# Altium PCB N20网关A.PcbDoc (part 1 of 2)
Units mil, origin at the board's own origin, x right, y up, seen from the top; angles counter-clockwise.
Board outline 6309.92 x 4341.03 mil, 2 copper layers (Top Layer, Bottom Layer); 157 components, 170 nets, 607 pads, 1300 vias.
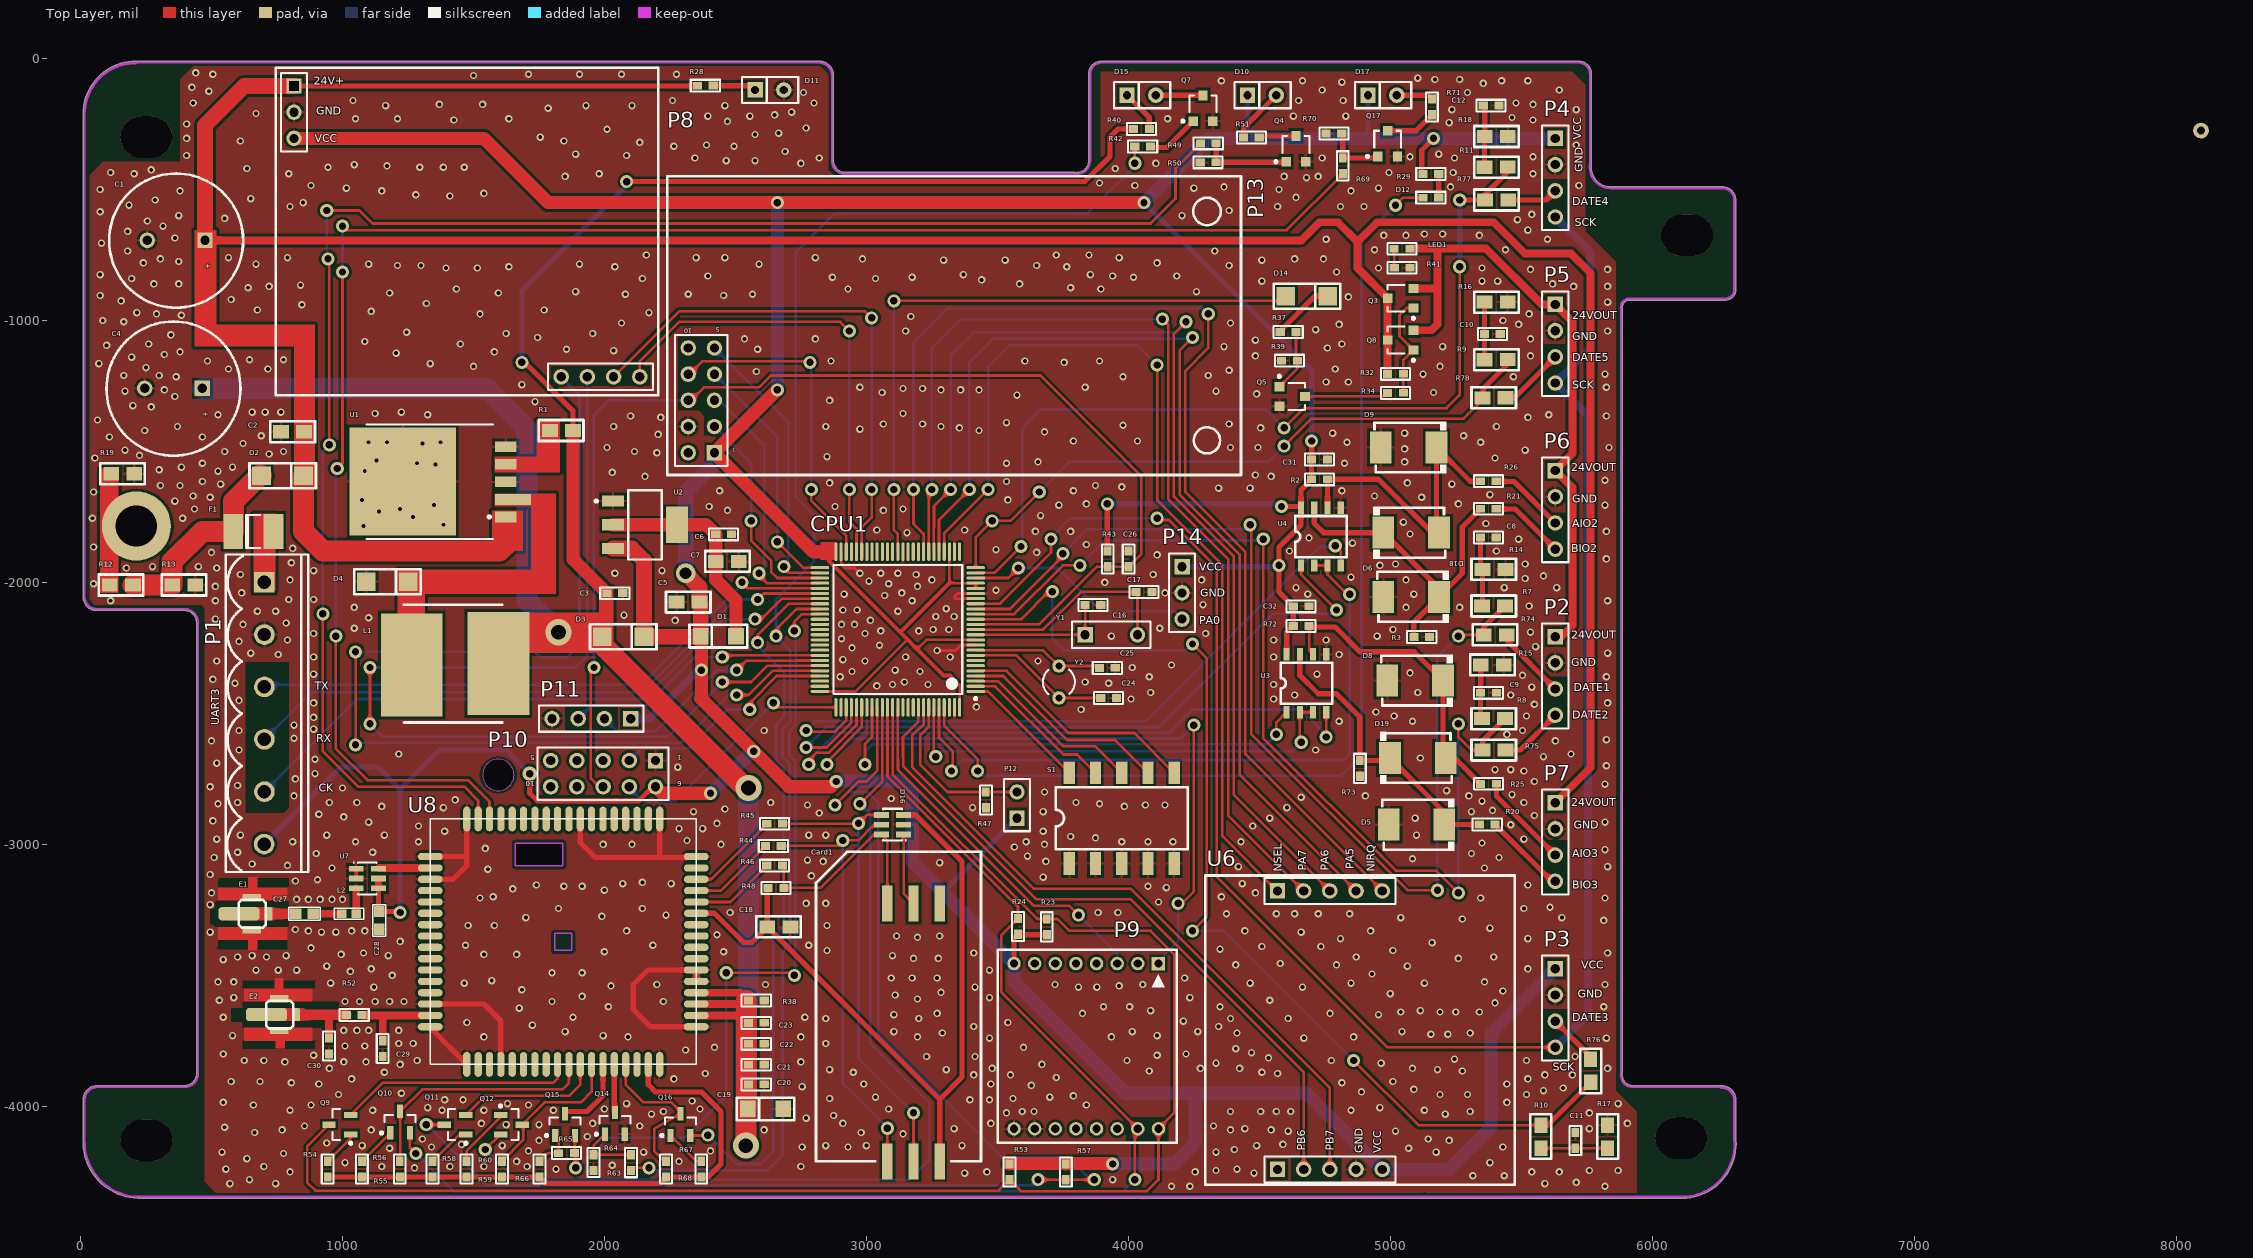
[diagram p0: Top Layer view]
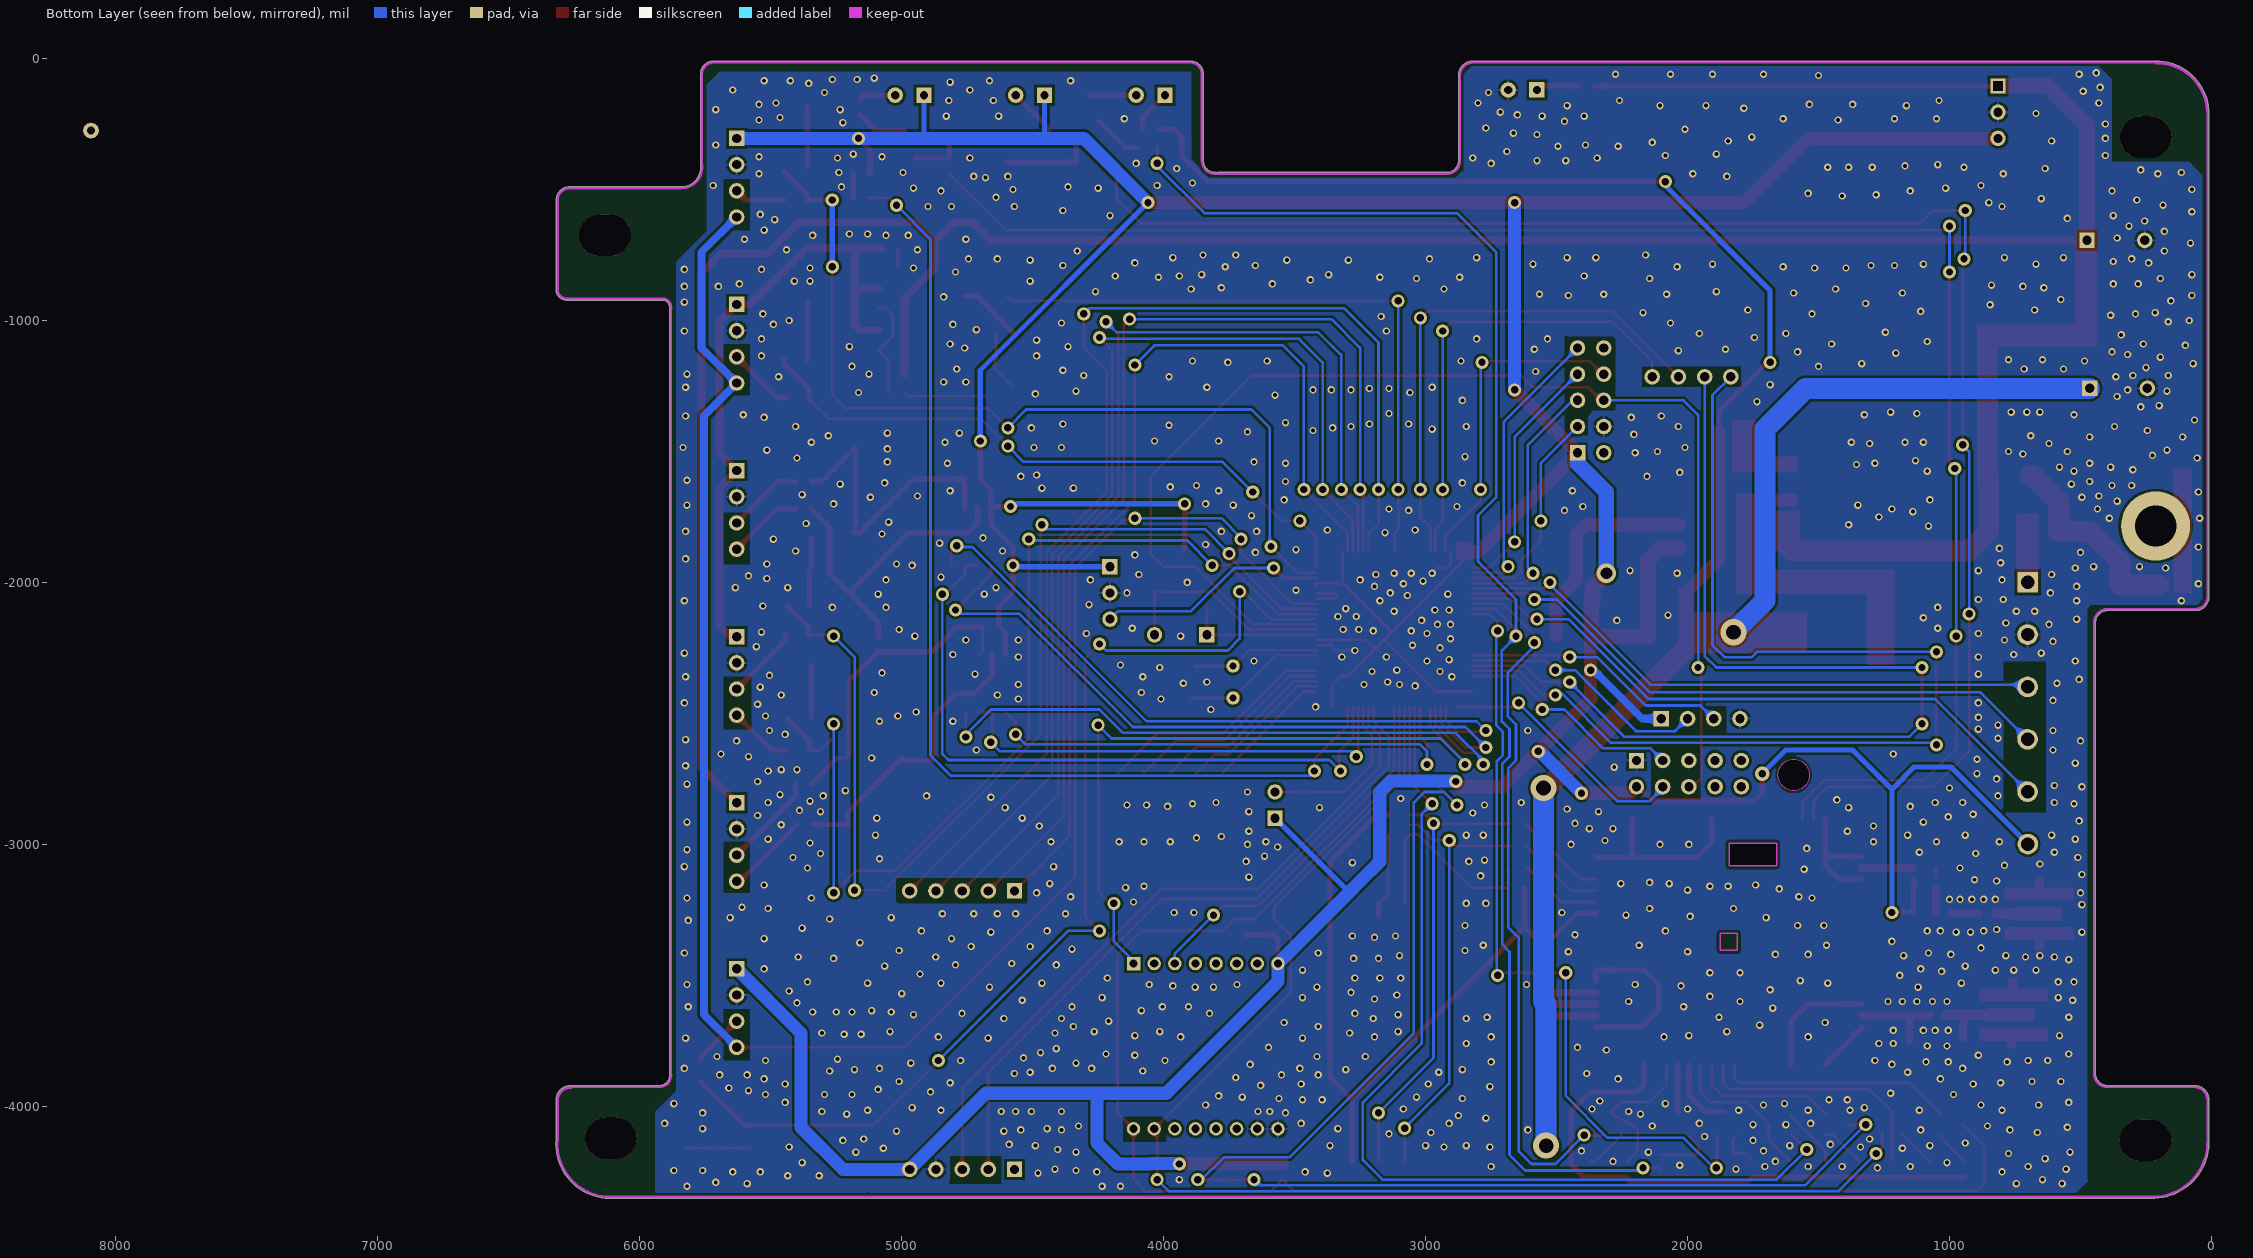
[diagram p1: Bottom Layer view, seen from below]

## Layer stack, top to bottom
Top Solder: solder mask 0.4, Solder Resist, Dk 3.5
Top Layer: signal copper 1.4
Dielectric 1: dielectric 12.6, FR-4, Dk 4.8
Bottom Layer: signal copper 1.4
Bottom Solder: solder mask 0.4, Solder Resist, Dk 3.5

## Board outline
9.98,-4128.92 ccw(c225,-4136) 217.83,-4351.01 ccw(c218,-4346) 219.69,-4350.72 3440.2,-4350.72 ccw(c3440.2,-4345.71) 3440.7,-4350.7 ccw(c3441.2,-4345.71) 3441.2,-4350.72 6128.31,-4350.72 ccw(c6130,-4346) 6130.47,-4350.99 ccw(c6111,-4143) 6319.9,-4143 ccw(c6111,-4143) 6319.01,-4123.77 6319.01,-3976 ccw(c6264,-3976) 6264,-3920.98 5925,-3920.98 cw(c5925,-3882) 5886.02,-3882.18 ccw(c5881.14,-3881) 5886.16,-3881 5886.16,-949 ccw(c5881.14,-949) 5885.98,-947.69 cw(c5913,-949) 5911.16,-922.02 6281.97,-922.02 ccw(c6282,-917) 6282.43,-922 ccw(c6279,-882) 6319.08,-884.19 ccw(c6314.21,-883) 6319.23,-883 ccw(c6314.21,-883) 6319.23,-883 6319.01,-539 ccw(c6314,-539) 6318.92,-538.05 ccw(c6267.5,-541.5) 6265.84,-489.99 ccw(c6266,-495) 6264.82,-490.12 5843.37,-490.12 ccw(c5841.19,-494.64) 5841.19,-489.63 cw(c5841.09,-415.7) 5767.25,-419.12 ccw(c5763.03,-416.4) 5768.05,-416.4 5768.05,-60 ccw(c5763.03,-60) 5768.05,-59.93 ccw(c5718.03,-60) 5718.03,-9.98 3898.58,-9.98 ccw(c3898.58,-60) 3848.57,-59.91 ccw(c3853.58,-60) 3848.57,-60 3848.57,-385 ccw(c3853.58,-385) 3849.23,-387.5 ccw(c3853.58,-390) 3848.57,-390 cw(c3803.58,-390) 3803.58,-434.98 ccw(c3803.58,-440) 3799.06,-437.84 ccw(c3794.53,-440) 3794.53,-434.98 2919.33,-434.98 cw(c2919.33,-390) 2874.35,-390 ccw(c2869.33,-390) 2874.35,-389.92 2874.35,-65 ccw(c2819.33,-65) 2819.33,-9.98 211.87,-9.98 ccw(c211.2,-211.2) 10.42,-197.96 ccw(c15,-200) 9.98,-200 9.98,-2058.11 ccw(c15,-2058.11) 10.07,-2059.02 ccw(c60.89,-2056.11) 60.89,-2107.01 397.88,-2107.01 cw(c395.5,-2154.5) 442.99,-2152.24 ccw(c448,-2152) 443.05,-2152.84 443.05,-3872.16 ccw(c448,-3873) 442.99,-3873.2 cw(c397,-3875) 443.02,-3875 cw(c397,-3875) 398.9,-3920.98 65,-3920.98 ccw(c65,-3976) 9.98,-3976
cut-out: 1660,-3081.73 1660,-2995.12 1840.91,-2995.12 1840.91,-3081.73
cut-out: 1535,-2735 ccw(c1595,-2735) 1595,-2795 ccw(c1595,-2735) 1655,-2735 ccw(c1595,-2735) 1595,-2675 ccw(c1595,-2735)

## Design rules (kind name [scope] priority, off if disabled: settings)
Clearance [All] p1: gap=10
HoleSize [All] p1: absolutevalues=TRUE maxlimit=999 minlimit=15 maxpercent=80.000 minpercent=20.000
HoleToHoleClearance [All] p1: gap=8 allowstackedmicrovias=TRUE
MinimumSolderMaskSliver [All] p1: minsoldermaskwidth=0
PolygonConnect [All] p1: connectstyle=Relief reliefconductorwidth=10 reliefentries=4 polygonreliefangle="90 Angle" airgapwidth=10
RoutingVias [InNet('GND')] p1: holewidth=15 width=28 viastyle="Through Hole" minholewidth=0 minwidth=0 maxholewidth=999 maxwidth=999
SilkToSilkClearance [All] p1: silktosilkclearance=0
SilkToSolderMaskClearance [IsPad] p1: minsilkscreentomaskgap=0 clearancetoexposedcopper=TRUE
SolderMaskExpansion [All] p1: expansion=4
Width [All] p1: maxlimit=100 minlimit=10 preferedwidth=10
25 further rules are at their usual default settings.

## Components (designator, comment, footprint, x,y, rotation, side; value= is the part's Value field where it differs from the comment)
C1 "C_470uF/63V" C470UF50V-H 365,-695 r90 top
C2 "C_0.1uF" 0805 765,-1425 r90 top
C3 "C_0.1uF" 0603 2030,-2040 r0 top
C4 "2200uF/25V" C470UF50V-H 355,-1260 r90 top
C5 "100nF" 0805 2275,-2075 r90 top
C6 "100nF" 0603 2445,-1815 r0 top
C7 "4.7uF" 0805 2425,-1920 r90 top
C8 "C_0.1uF" 0603 5384.28,-1830 r180 top
C9 "C_0.1uF" 0603 5365,-2420 r0 top
C10 "C_0.1uF" 0603 5380,-1050 r0 top
C11 "C_0.1uF" 0603 5705,-4140 r90 top
C12 "C_0.1uF" 0603 5375.23,-178.66 r0 top
C16 "C_10pF" 0603 3855,-2085 r0 top
C17 "C_10pF" 0603 4050,-2035 r0 top
C18 "C_0.1uF" 0805 2710,-3315 r270 top
C19 "220uF" 1206 2615,-4010 r0 top
C20 "C_0.1uF" 0603 2570,-3915 r0 top
C21 "C_0.1uF" 0603 2570,-3840 r0 top
C22 "C_0.1uF" 0603 2570,-3760 r0 top
C23 "C_0.1uF" 0603 2570,-3680 r0 top
C24 "C_10pF" 0603 3915,-2440 r0 top
C25 "C_10pF" 0603 3910,-2325 r0 top
C26 "C_100nF" 0603 4000,-1920 r90 top
C27 "470pF" 1608[0603] 855,-3265 r0 top
C28 "0.1uF" 1608[0603] 1140,-3290 r90 top
C29 "缺省" 0603 1155,-3770 r270 top
C30 "缺省" 0603 950,-3760 r270 top
C31 "0.1uF" 0603 4720,-1530 r0 top
C32 "0.1uF" 0603 4650,-2090 r0 top
Card1 "Card" SIM 3280,-4210 r90 top
CPU1 "STM32F103VET6" LQFP100_N 3120,-2180 r180 top
D1 "1N4148" 1206 2435,-2205 r0 top
D2 "MURA240" 1N4007-M7 855,-1590 r180 top
D3 "SS36" 1N4007-M7 2155,-2205 r180 top
D4 "SS36" 1N4007-M7 1255,-1995 r180 top
D5 "SMBJ6.8CA" DO-214AB 5100,-2925 r180 top
D6 "SMBJ6.8CA" DO-214AB 5080,-2055 r180 top
D8 "SMBJ6.8CA" DO-214AB 5095,-2375 r180 top
D9 "SMBJ6.8CA" DO-214AB 5070,-1485 r180 top
D10 "LED BLUE" LED-3mm 4455,-140 r0 top
D11 "LED RED" LED-3mm 2575,-120 r0 top
D12 "Green" 0603 5145,-530 r0 top
D14 "1N4007" 1N4007-M7 4765,-905 r180 top
D15 "LED GREEN" LED-3mm 3995,-140 r0 top
D16 "SRV05-4" SOT23-6 3100,-2925 r90 top
D17 "LED BLUE" LED-3mm 4915,-140 r0 top
D18 "SMBJ6.8CA" DO-214AB 5080,-1810 r0 top
D19 "SMBJ6.8CA" DO-214AB 5105,-2670 r0 top
E1 "Antenna" IPX 655,-3265 r90 top
E2 "Antenna" IPX 760,-3650 r90 top
F1 "自恢复保险丝" 1812 660,-1805 r0 top
L1 "贴片电感" L101 1385,-2310 r180 top
L2 "6.8nH" L0603 1025,-3265 r0 top
LED1 "LED 3mm" 0603 5035,-725 r0 top
P1 "Header 6" PCBComponent_1#1 140,-2730 r0 top
P2 "Header 4" HDR1X4 5630,-2207 r270 top
P3 "Header 4" HDR1X4 5630,-3475 r270 top
P4 "Header 4" HDR1X4 5630,-305 r270 top
P5 "Header 4" HDR1X4 5630,-939 r270 top
P6 "Header 4" HDR1X4 5630,-1573 r270 top
P7 "Header 4" HDR1X4 5630,-2841 r270 top
P8 "Header 7" USB2 825,-735 r0 top
P9 "排针" WIFI2 4115,-3455 r270 top
P10 "SWD" HDR2X5_CEN 2195,-2680 r180 top
P11 "下载线" HDR1X4 2100,-2520 r180 top
P12 "跳线" HDR1X2 3575,-2900 r90 top
P13 "TCP/IP" TCP-IP 2420,-1505 r180 top
P14 "MCU唤醒" HDR1X3 4205,-1940 r270 top
Q3 "2N2907" Q 4990,-915 r90 top
Q4 "9013" SOT-23 4640,-345 r0 top
Q5 "5551" Q 4675,-1290 r270 top
Q7 "9013" SOT-23 4285,-190 r0 top
Q8 "2N2907" Q 4990,-1075 r90 top
Q9 "MMBT3904" SOT23_N 990,-4070 r180 top
Q10 "MMBT3904" SOT23_N 1220,-4060 r90 top
Q11 "MMBT3904" SOT23_N 1430,-4070 r180 top
Q12 "MMBT3904" SOT23_N 1645,-4070 r0 top
Q14 "MMBT3904" SOT23_N 2040,-4065 r90 top
Q15 "MMBT3904" SOT23_N 1850,-4070 r90 top
Q16 "MMBT3904" SOT23_N 2290,-4070 r90 top
Q17 "9013" SOT-23 4990,-325 r0 top
R1 "330R" 0805 1880,-1420 r270 top
R2 "4.7K" 0603 4720,-1605 r0 top
R3 "100R" 0603 5130,-2210 r180 top
R7 "50R" 0805 5350,-2090 r90 top
R8 "50R" 0805 5350,-2520 r90 top
R9 "50R" 0805 5360,-1150 r90 top
R10 "50R" 0805 5575,-4160 r180 top
R11 "50R" 0805 5360,-415 r90 top
R12 "压敏电阻" 0805 200,-2010 r270 top
R13 "压敏电阻" 0805 350,-2010 r90 top
R14 "50R" 0805 5440,-1950 r270 top
R15 "50R" 0805 5345,-2315 r90 top
R16 "50R" 0805 5360,-930 r90 top
R17 "50R" 0805 5830,-4160 r180 top
R18 "50R" 0805 5360.23,-297.63 r90 top
R19 "压敏电阻" 0805 205,-1585 r270 top
R20 "100R" 0603 5380,-2925 r180 top
R21 "100R" 0603 5384.28,-1720 r180 top
R23 "470R" 0603 3690,-3305 r270 top
R24 "470R" 0603 3580,-3303.43 r270 top
R25 "100R" 0603 5385,-2770 r180 top
R26 "100R" 0603 5384.28,-1615 r180 top
R28 "R_5.1K" 0603 2395,-105 r180 top
R29 "R_1K" 0603 5145,-440 r0 top
R32 "R_10K" 0603 5030,-1205 r180 top
R34 "R_1K" 0603 5010,-1275 r0 top
R37 "R_1K" 0603 4620,-1045 r180 top
R38 "缺省" 0603 2570,-3595 r0 top
R39 "R_10K" 0603 4625,-1155 r180 top
R40 "R_1K" 0603 4060,-270 r180 top
R41 "R_5.1K" 0603 5055,-800 r180 top
R42 "R_2.2K" 0603 4045,-335 r0 top
R43 "R_3.3K" 0603 3920,-1920 r90 top
R44 "20R" 0603 2635,-3005 r0 top
R45 "20R" 0603 2640,-2920 r0 top
R46 "20R" 0603 2640,-3080 r0 top
R47 "R_3.3K" 0603 3455,-2840 r90 top
R48 "470R" 0603 2645,-3165 r0 top
R49 "Res2" 0603 4315,-325 r180 top
R50 "Res2" 0603 4295,-395 r0 top
R51 "Res2" 0603 4460,-300 r0 top
R52 "0" 0603 1035,-3650 r0 top
R53 "10K" 0603 3545,-4260 r90 top
R54 "4.7K" 0603 945,-4230 r270 top
R55 "10K" 0603 1220,-4230 r270 top
R56 "4.7K" 0603 1075.25,-4230 r270 top
R57 "10K" 0603 3760,-4260 r90 top
R58 "4.7K" 0603 1345,-4230 r270 top
R59 "10K" 0603 1610,-4230 r270 top
R60 "4.7K" 0603 1475,-4230 r270 top
R63 "10K" 0603 2100,-4225 r90 top
R64 "10K" 0603 1960,-4205 r270 top
R65 "47K" 0603 1865,-4180 r180 top
R66 "4.7K" 0603 1753.66,-4230 r270 top
R67 "10K" 0603 2236,-4230 r270 top
R68 "4.7K" 0603 2371,-4230 r270 top
R69 "Res2" 0603 4820,-400 r270 top
R70 "Res2" 0603 4775,-285 r0 top
R71 "Res2" 0603 5160,-175 r270 top
R72 "4.7K" 0603 4650,-2165 r0 top
R73 "4.7K" 0603 4885,-2700 r270 top
R74 "50R" 0805 5445,-2200 r270 top
R75 "50R" 0805 5440,-2640 r270 top
R76 "50R" 0805 5765,-3820 r0 top
R77 "50R" 0805 5450,-540 r270 top
R78 "50R" 0805 5440,-1295 r270 top
S1 "贴片拨码开关" Switch10 3975,-2900 r0 top
U1 "LM2576HV-3.3V" TO-263(S) 1220,-1615 r0 top
U2 "AMS1117-1.8V" SOT223 2155,-1780 r270 top
U3 "SN65HVD11" SN65HVD11 4680,-2385 r0 top
U4 "SN65HVD11" SN65HVD11 4735,-1825 r0 top
U6 "433M" 433M 5475,-3040 r270 top
U7 "AT2659S" SOT23-6 1095,-3130 r270 top
U8 "" PCBComponent_1#2 1335,-3840 r0 top
Y1 "XTAL 8M" "XTAL 8M" 3835,-2200 r0 top
Y2 "XTAL  32.768K" R38 3735,-2380 r180 top

## Footprints (in the part's own frame and the unit in brackets; to place one, negate y for a bottom-side part, rotate by r counter-clockwise, add the part's x,y. Pads: shape width x height; smd on the part's side, far side on the other; paste and mask are expansions set on the pad)
1N4007-M7 [mm]
  rect 1.8x1.8 smd: 1(4.166,0.05) 2(0.096,0.05)
  silkscreen extent -1.12,-1.14 5.33,1.27
433M [mm]
  rect 1.5x1.5 hole 0.9: 1(3.5,-23) 6(30.5,-23)
  round 1.5 hole 0.9: 2(3.5,-20.46) 3(3.5,-17.92) 4(3.5,-15.38) 5(3.5,-12.84) 7(30.5,-20.46) 8(30.5,-17.92) 9(30.5,-15.38) 10(30.5,-12.84)
  silkscreen extent 2,-30 32,0
0603 [mil] "0603"
  rect 35x30 smd: 1(40,-1) 2(-20.23,-1.34)
  silkscreen extent -46,-24 65,21
0805 [mil]
  rect 50x60 smd: 1(0,0) 2(0.28,-88.04)
  silkscreen extent -40,-130 40,40
1206 [mm]
  rect 1.52x1.6 smd: 1(-1.71,0) 2(1.71,0)
  silkscreen extent -2.79,-1.1 2.79,1.1
1608[0603] [mm] "Chip Capacitor; Body 1.6 x 0.8 mm (LxW typ)"
  rect 1.1x1 smd: 1(-0.85,0) 2(0.85,0)
  silkscreen extent -1.52,-0.64 1.52,0.64
1812 [mm] "Chip Capacitor; Body 4.5 x 3.2 mm (LxW typ)"
  rect 1.9x3.4 smd: 1(-1.95,0) 2(1.95,0)
  silkscreen extent -0.7,-1.6 0.7,1.6
C470UF50V-H [mm]
  rect 1.5x1.5 hole 0.9: 1(0.02,-2.8)
  round 1.5 hole 0.9: 2(0.02,2.8)
  silkscreen extent -6.5,-6.5 6.5,6.5
DO-214AB [mm]
  rect 2.1x3.1 smd: 1(2.7,0) 2(-2.7,0)
  silkscreen extent -3.68,-2.54 3.3,2.54
HDR1X2 [mm] "Connector; Header; 2 Position"
  rect 1.5x1.5 hole 0.9: 1(0,0)
  round 1.5 hole 0.9: 2(2.54,0)
  silkscreen extent -1.27,-1.27 3.81,1.27
HDR1X3 [mm] "Connector; Header; 3 Position"
  rect 1.5x1.5 hole 0.9: 1(0,0)
  round 1.5 hole 0.9: 2(2.54,0) 3(5.08,0)
  silkscreen extent -1.27,-1.27 6.35,1.27
HDR1X4 [mm] "Connector; Header; 4 Position"
  rect 1.5x1.5 hole 0.9: 1(0,0)
  round 1.5 hole 0.9: 2(2.54,0) 3(5.08,0) 4(7.62,0)
  silkscreen extent -1.27,-1.27 8.89,1.27
HDR2X5_CEN [mm] "Connector; Header; 5x2 Position"
  rect 1.5x1.5 hole 0.9: 1(0,0)
  round 1.5 hole 0.9: 2(2.54,0) 3(5.08,0) 4(7.62,0) 5(10.16,0) 6(0,2.54) 7(2.54,2.54) 8(5.08,2.54) 9(7.62,2.54) 10(10.16,2.54)
  silkscreen extent -1.27,-1.27 11.43,3.81
IPX [mil]
  rrect50% 50x31.5 smd: 1(0,-63)
  rect 27.56x70.87 smd: 2(61,1) 4(-61,1)
  silkscreen extent -53,-52 53,51
L101 [mm]
  rect 6x10 smd: 1(3.056,0.127) 2(-5.342,0)
  silkscreen extent -5.72,-5.72 3.81,5.72
L0603 [mm] "Chip Inductor; Body 1.6 x 0.8 mm (LxW typ)"
  rect 0.9x0.8 smd: 1(-0.7,0) 2(0.7,0)
  silkscreen extent -1.42,-0.53 1.42,0.53
LED-3mm [mm] "Connector; Header; 5 Position"
  rect 1.5x1.5 hole 0.8: 1(0,0)
  round 1.5 hole 0.8: 2(2.794,0)
  silkscreen extent -1.27,-1.27 4.19,1.27
LQFP100_N [mm]
  oval 1.8x0.3 smd: 1(-7.55,6) 2(-7.55,5.5) 3(-7.55,5) 4(-7.55,4.5) 5(-7.55,4) 6(-7.55,3.5) 7(-7.55,3) 8(-7.55,2.5) 9(-7.55,2) 10(-7.55,1.5) 11(-7.55,1) 12(-7.55,0.5) 13(-7.55,0) 14(-7.55,-0.5) 15(-7.55,-1) 16(-7.55,-1.5) 17(-7.55,-2) 18(-7.55,-2.5) 19(-7.55,-3) 20(-7.55,-3.5) 21(-7.55,-4) 22(-7.55,-4.5) 23(-7.55,-5) 24(-7.55,-5.5) 25(-7.55,-6) 51(7.55,-6) 52(7.55,-5.5) 53(7.55,-5) 54(7.55,-4.5) 55(7.55,-4) 56(7.55,-3.5) 57(7.55,-3) 58(7.55,-2.5) 59(7.55,-2) 60(7.55,-1.5) 61(7.55,-1) 62(7.55,-0.5) 63(7.55,0) 64(7.55,0.5) 65(7.55,1) 66(7.55,1.5) 67(7.55,2) 68(7.55,2.5) 69(7.55,3) 70(7.55,3.5) 71(7.55,4) 72(7.55,4.5) 73(7.55,5) 74(7.55,5.5) 75(7.55,6)
  oval 0.3x1.8 smd: 26(-6,-7.55) 27(-5.5,-7.55) 28(-5,-7.55) 29(-4.5,-7.55) 30(-4,-7.55) 31(-3.5,-7.55) 32(-3,-7.55) 33(-2.5,-7.55) 34(-2,-7.55) 35(-1.5,-7.55) 36(-1,-7.55) 37(-0.5,-7.55) 38(0,-7.55) 39(0.5,-7.55) 40(1,-7.55) 41(1.5,-7.55) 42(2,-7.55) 43(2.5,-7.55) 44(3,-7.55) 45(3.5,-7.55) 46(4,-7.55) 47(4.5,-7.55) 48(5,-7.55) 49(5.5,-7.55) 50(6,-7.55) 76(6,7.55) 77(5.5,7.55) 78(5,7.55) 79(4.5,7.55) 80(4,7.55) 81(3.5,7.55) 82(3,7.55) 83(2.5,7.55) 84(2,7.55) 85(1.5,7.55) 86(1,7.55) 87(0.5,7.55) 88(0,7.55) 89(-0.5,7.55) 90(-1,7.55) 91(-1.5,7.55) 92(-2,7.55) 93(-2.5,7.55) 94(-3,7.55) 95(-3.5,7.55) 96(-4,7.55) 97(-4.5,7.55) 98(-5,7.55) 99(-5.5,7.55) 100(-6,7.55)
  silkscreen extent -7.68,-6.25 6.25,6.82, body extent -7,-7 7,7, height 1.6
PCBComponent_1#1 [mm]
  rect 2x2 hole 1.3: 1(14.275,18.567)
  round 2 hole 1.3: 2(14.275,13.487) 3(14.275,8.407) 4(14.275,3.327) 5(14.275,-1.753) 6(14.249,-6.833)
  silkscreen extent 10.52,-9.53 18.52,21.23
PCBComponent_1#2 [mm]
  oval 0.7x2.4 smd: 1(3.55,0) 1(3.55,0) 2(4.65,0) 3(5.75,0) 4(6.85,0) 5(7.95,0) 6(9.05,0) 7(10.15,0) 8(11.25,0) 9(12.35,0) 10(13.45,0) 11(14.55,0) 12(15.65,0) 13(16.75,0) 14(17.85,0) 15(18.95,0) 16(20.05,0) 16(20.05,0) 17(21.15,0) 17(21.15,0) 18(22.25,0) 35(22.25,23.8) 35(22.25,23.8) 36(21.15,23.8) 37(20.05,23.8) 38(18.95,23.8) 39(17.85,23.8) 40(16.75,23.8) 41(15.65,23.8) 42(14.55,23.8) 43(13.45,23.8) 44(12.35,23.8) 45(11.25,23.8) 46(10.15,23.8) 47(9.05,23.8) 48(7.95,23.8) 49(6.85,23.8) 50(5.75,23.8) 51(4.65,23.8) 52(3.55,23.8)
  oval 2.4x0.7 smd: 19(25.8,3.65) 19(25.8,3.65) 20(25.8,4.75) 21(25.8,5.85) 22(25.8,6.95) 23(25.8,8.05) 24(25.8,9.15) 25(25.8,10.25) 26(25.8,11.35) 27(25.8,12.45) 28(25.8,13.55) 29(25.8,14.65) 30(25.8,15.75) 31(25.8,16.85) 32(25.8,17.95) 33(25.8,19.05) 34(25.8,20.15) 53(0,20.15) 53(0,20.15) 54(0,19.05) 55(0,17.95) 56(0,16.85) 57(0,15.75) 58(0,14.65) 59(0,13.55) 60(0,12.45) 61(0,11.35) 62(0,10.25) 63(0,9.15) 64(0,8.05) 65(0,6.95) 66(0,5.85) 68(0,3.65)
  oval 2.4x0.7 smd paste+0: 67(0,4.75)
  Keep-Out Layer lines w0.127: 8.255,19.26 12.85,19.26 12.85,21.46 8.255,21.46 8.255,19.26 ; 12.065,11.049 13.716,11.049 13.716,12.7 12.065,12.7 12.065,11.049
  silkscreen extent 0,0 25.8,23.8
Q [mm]
  rect 0.9x0.95 smd: 1(0.95,-2.5) 2(-0.95,-2.5) 3(0,0)
  silkscreen extent -2.07,-2.63 1.3,0
R38 [mm] "Crystal, Thru-Hole; 2 Leads; Body 3.1 x 8.2 mm (Dia.xH)"
  round 1.3 hole 0.7: 1(0,1.55) 2(0,-1.55)
  silkscreen extent -1.55,-1.19 1.55,1.17
SIM [mm]
  rect 3.5x1 smd: 1(0,0) 2(0,2.54) 3(0,5.08) 4(25,0) 5(25,2.54) 6(25,5.08)
  silkscreen extent 0,-4 30,12
SN65HVD11 [mm]
  rect 0.6x1.2 smd: 1(-1.92,-2.8) 2(-0.64,-2.8) 3(0.64,-2.8) 4(1.92,-2.8) 5(1.92,2.8) 6(0.64,2.8) 7(-0.64,2.8) 8(-1.92,2.8)
  silkscreen extent -2.5,-2 2.5,2
SOT23-6 [mm] "SOT-23/SC-74A; 5 Leads; Body 3.1 x 3 mm, inc. leads (LxW max)"
  rect 0.55x1.45 smd: 1(-0.95,-1.075) 2(0,-1.075) 3(0.95,-1.075) 4(0.95,1.075) 5(0,1.075) 6(-0.95,1.075)
  silkscreen extent -1.57,-1.35 1.55,0.9
SOT23_N [mm] "SOT23, 3-Leads, Body 2.9x1.3mm, Pitch 0.95mm, Lead Span 2.3mm, IPC Medium Density"
  rect 1.3x0.6 smd: 1(-1.05,0.95) 2(-1.05,-0.95) 3(1.05,0)
  silkscreen extent -1.18,-1.5 0.7,1.92, body extent -0.7,-1.5 0.7,1.5, height 1.1
SOT223 [mm] "SOT-223/SC-73; 4 Leads; Body 6.7 x 7.3 mm, inc. leads (LxW max)"
  rect 1.1x2.15 smd: 1(-2.3,-3.1) 2(0,-3.1) 3(2.3,-3.1)
  rect 3.5x2.15 smd: 4(0,3.1)
  silkscreen extent -3.35,-4.85 3.35,1.62
SOT-23 [mm] "SOT-23; 3 Leads; Body 3.0 x 2.6 mm, inc. leads (LxW max)"
  rect 0.9x0.95 smd: 1(-0.95,-1.25) 2(0.95,-1.25) 3(0,1.25)
  silkscreen extent -2.07,-1.37 1.3,1.25
Switch10 [mm]
  rect 1.1x2.2 smd: 1(-5.08,-4.4) 2(-2.54,-4.4) 3(0,-4.4) 4(2.54,-4.4) 5(5.08,-4.4) 6(5.08,4.4) 7(2.54,4.4) 8(0,4.4) 9(-2.54,4.4) 10(-5.08,4.4)
  silkscreen extent -6.4,-3 6.4,3
TCP-IP [mm]
  rect 1.5x1.5 hole 0.9: 1(0,0)
  round 1.5 hole 0.9: 2(0,-2.54) 3(0,-5.08) 4(0,-7.62) 5(0,-10.16) 6(2.54,0) 7(2.54,-2.54) 8(2.54,-5.08) 9(2.54,-7.62) 10(2.54,-10.16)
  silkscreen extent -51.05,-26.8 4.57,2.16
TO-263(S) [mm]
  rect 2.1x1.05 smd: 1(10.247,-3.425) 3(10.247,-0.025) 4(10.247,1.675) 5(10.247,3.375)
  rect 3.5x1.05 smd: 2(10.947,-1.753)
  rect 10.3x10.5 smd: 3(0.256,0)
  silkscreen extent -3.25,-5.58 9,5.52
USB2 [mm]
  rect 1.5x1.5 hole 0.9 square: 1(-0.254,16.002)
  round 1.5 hole 0.9: 2(25.654,-12.192) 3(28.194,-12.192) 4(30.734,-12.192) 5(33.274,-12.192) 6(-0.254,13.462) 7(-0.254,10.922)
  silkscreen extent -2.03,-13.97 35.05,17.78
WIFI2 [mm]
  rect 1.3x1.3 hole 0.8: 1(0,0)
  round 1.3 hole 0.8: 2(16.03,0) 3(0,-2) 4(16.03,-2) 5(0,-4) 6(16.03,-4) 7(0,-6) 8(16.03,-6) 9(0,-8) 10(16.03,-8) 11(0,-10) 12(16.03,-10) 13(0,-12) 14(16.03,-12) 15(0,-14) 16(16.03,-14)
  silkscreen extent -1.35,-15.57 17.38,1.78
"XTAL 8M" [mm]
  rect 1.5x1.5 hole 0.9: 1(0,0)
  round 1.5 hole 0.9: 2(5.08,0)
  silkscreen extent -1.27,-1.27 6.35,1.27

## Part data
C1: library part "Cap Pol1", "插件 电解电容 13*21"
C2 C3 C5 C6 C7 C8 C9 C10 C11 C12 C16 C17 C18 C20 C21 C22 C23 C24 C25 C26: library part Cap, "贴片电容 0603"
C4: library part "Cap Pol1", "插件 体积13*20mm"
C19: library part "Cap Pol1", "Polarized Capacitor (Radial)"
C27 C28 C29 C30 C31 C32: library part Cap, "Capacitor"
CPU1: library part STM32F103VBT6, "贴片ARM芯片"
D1 D2: library part Diode, "贴片二极管 M7"
D3 D4: library part "Diode 1N4007", "贴片二极管 SMA"
D5 D6 D8 D9 D18 D19: "贴片双向瞬变抑制二极管 D0-214AA"
D10 D11 D17: library part LED0, "插件 发光二极管 5mm 红发红光"
D12: library part "LED 3mm", "贴片发光二极管 0603 绿色"
D14: library part "Diode 1N4007", "1 Amp General Purpose Rectifier"
D15: library part LED0, "插件 发光二极管 5mm 绿发绿光"
D16: library part SMF05C, "SOT363"
E1 E2: "Generic Antenna"
F1: library part "Fuse 2", "1812 1.1A 33V"
L1: library part Inductor, "贴片电感 12*12*7mm 100uH"
L2: library part Inductor, "Inductor"
LED1: "LED_R"
P1: "Header, 6-Pin"
P2 P3 P4 P5 P6 P7: "Header, 4-Pin"
P8: "Header, 7-Pin"
P9: library part "Header 8X2", "插件 8P 间距2mm"
P10 P13 U6: library part "Header 5X2A", "Header, 5-Pin, Dual row"
P11: library part "Header 4", "Header, 4-Pin"
P12: library part "Header 2", "Header, 2-Pin"
P14: library part "Header 3", "Header, 3-Pin"
Q3 Q8: library part PNP, "PNP Bipolar Transistor"
Q4 Q7 Q17: library part NPN, "贴片三极管MMBT5551 SOT-23"
Q5: library part 2N3904, "2N3904"
Q9 Q10 Q11 Q12 Q14 Q15 Q16: "NPN Switching Transistor"
R1 R7 R8 R9 R10 R11 R14 R15 R16 R17 R18 R74 R75 R76 R77 R78: library part Res2, "贴片电阻 0805 精度0.1%"
R2 R3 R20 R21 R25 R26 R29 R72 R73: library part Res2, "贴片电阻 0603"
R12 R13 R19: library part "Res Varistor", "耐压56V 0805"
R23 R24 R48: library part Res1, "贴片电阻 0603"
R28 R44 R45 R46: library part Resistor, "贴片电阻 0603"
R32 R34 R37 R38 R39 R52 R53 R54 R55 R56 R57 R58 R59 R60 R63 R64 R65 R66 R67 R68: library part Res2, "Resistor"
R40 R42: library part Resistor, "Resistor"
R41: library part Res2, "R_10K"
R43 R47: library part Res3, "贴片电阻 0603"
R49 R50 R51 R69 R70 R71: "Resistor"
S1: library part Switch, "5P 2.54MM  黑色"
U1: library part Component_1, "贴片电源芯片 TO-263"
U2: library part AS1117, "VOLTAGE REGULATOR"
U3 U4: "贴片芯片"
U7 U8: library part Component_1
Y1: "晶振"
Y2: library part XTAL, "晶振"

## Free pads (board coordinates)
  round 263.78 hole 157.48: 0(213.17,-1784.65)
  rrect100% 196.85x157.48 hole 157.48 slot 196.85 at 0 deg: 0(251,-300) 0(252,-4130) 0(6110.49,-4121.3) 0(6133.11,-675)
  rrect50% 157.48x50 smd: 1(605,-3265) 1(710,-3650)
  round 60 hole 30: 3(8095,-275)

## Via types
v1: diameter 28, hole 15, Top Layer to Bottom Layer, 1174 vias
v2: diameter 50, hole 28, Top Layer to Bottom Layer, 121 vias
v3: diameter 100, hole 56, Top Layer to Bottom Layer, 3 vias
v4: diameter 75, hole 45, Top Layer to Bottom Layer, 1 vias
v5: diameter 56, hole 28, Top Layer to Bottom Layer, 1 vias

## Nets (pads, with @x,y where several pads share a name; then routed paths per layer and width w, separated by ;. In a path a pad name is that pad's centre, name@x,y a point inside that pad or via, vN(x,y) a via of type N, cw(c..) or ccw(c..) an arc to the next point about the centre after c; other vN are vias at no path point)
1.8V: C6.2 C7.1 D1.2 U2.2 U2.4 | length 827.7
  Top Layer w50: U2.2@2032.95,-1780 U2.4@2277.05,-1780 2388.43,-1780 C6.2@2424.77,-1816.34 2425,-1816.57 C7.1@2425,-1920 2425,-1990 2502.32,-2067.32 D1.2@2502.32,-2205
1P8: R54.1 R55.1 R56.1 R58.1 R59.1 R60.1 R66.1 R67.1 R68.1 U8.17 | length 2125.3
  Top Layer w20: R54.1@944,-4270 R56.1@1074.25,-4270 R55.1@1204.49,-4270 ; R55.1@1219,-4270 R58.1@1344,-4270 R60.1@1474,-4270 R59.1@1609,-4270 R66.1@1752.66,-4270 1777.66,-4295 2210,-4295 R67.1@2235,-4270 R68.1@2370,-4270 2395,-4270 2445,-4220 2445,-4020 2370,-3945 2195,-3945 2167.68,-3917.68 U8.17@2167.68,-3840
24V+: C1.1 C2.2 D2.2 P7.1 P8.1 Q3.3 Q8.3 R28.1 R32.1 U1.1 | length 11514.2
  Top Layer w20: P8.1@815,-105 R28.1@2355,-105
  Top Layer w30: C1.1@475.24,-694.21 4660.79,-694.21 4730,-625 4800,-625 4875,-700 ; R32.1@4990,-1204 Q8.3@4990,-1075 Q3.3@4990,-915 4875,-800 4875,-700 ; P7.1@5630,-2841 5765,-2706 5765,-820 5690,-745 5515,-745 5395,-625 4950,-625 4875,-700
  Top Layer w60: C1.1@475.24,-694.21 475.24,-254.76 625,-105 P8.1@815,-105
  Top Layer w80: D2.2@851.21,-1591.98 851.21,-1806.21 925,-1880 1600,-1880 1635,-1845
24VOUT: LED1.1 P2.1 P5.1 P6.1 Q3.1 Q8.1 | length 2518.9
  Top Layer w30: LED1.1@5075,-726 5076,-725 5180,-725 ; Q8.1@5088.43,-1037.6 5157.4,-1037.6 5180,-1015 5180,-870 ; Q3.1@5088.43,-877.6 5172.4,-877.6 5180,-870 ; P2.1@5630,-2207 5653,-2207 5695,-2165 5695,-1638 P6.1@5630,-1573 5695,-1508 5695,-1004 P5.1@5630,-939 5579,-939 5365,-725 5180,-725 ; 5180,-870 5180,-725
ADC: P9.3
AIO2: P6.3 R26.2 | length 289.6
  Top Layer w20: R26.2@5405.85,-1615 5472,-1615 P6.3@5630,-1773
AIO3: P7.3 R25.2 | length 365.4
  Top Layer w20: R25.2@5405.23,-2768.66 5405.23,-2816.23 P7.3@5630,-3041
BIO2: P6.4 R21.2 | length 287.5
  Top Layer w20: R21.2@5405.85,-1720 5477,-1720 P6.4@5630,-1873
BIO3: P7.4 R20.2 | length 319.8
  Top Layer w20: R20.2@5400.23,-2923.66 5617.57,-3141 P7.4@5630,-3141
BOOT0: CPU1.94 P12.2 R47.1 | length 645
  Top Layer w10: CPU1.94@3238.11,-2477.24 3238.11,-2551.89 3205,-2585 3205,-2695 3310,-2800 R47.1@3456,-2800 P12.2@3575,-2800
CTS: Q12.3 R59.2 U8.12 | length 590.7
  Top Layer w10: R59.2@1608.66,-4209.77 1690,-4128.43 Q12.3@1690,-4073.66 ; Q12.3@1686.34,-4070 1771.34,-3985 1910,-3985 1951.14,-3943.86 U8.12@1951.14,-3840
DATE1: P2.3 R74.1 | length 283.6
  Top Layer w20: R74.1@5445,-2200 5445,-2222 P2.3@5630,-2407
DATE2: P2.4 R75.1 | length 245.1
  Top Layer w20: R75.1@5440,-2640 5497,-2640 P2.4@5630,-2507
DATE3: P3.3 R76.1 | length 200.9
  Top Layer w20: P3.3@5630,-3675 5765,-3810 R76.1@5765,-3820
DATE4: P4.3 R77.1 | length 194.5
  Top Layer w20: R77.1@5450,-540 5595,-540 P4.3@5630,-505
DATE5: P5.3 R78.1 | length 254.6
  Top Layer w20: R78.1@5440,-1295 5474,-1295 P5.3@5630,-1139
DGND: pad.0@213.17,-1784.65 R12.2 R19.2
DTR: Q16.3 R67.2 U8.15 | length 598
  Top Layer w10: U8.15@2081.06,-3840 2081.06,-3916.06 2150,-3985 2255.67,-3985 2290,-4019.33 Q16.3@2290,-4028.66 2190,-4085 2190,-4170 2229.77,-4209.77 R67.2@2234.66,-4209.77
EXT_GNSS: U8.56
GND: C1.2 C2.1 C3.1 C4.2 C5.1 C6.1 C7.2 C8.2 C9.1 C10.1 C11.1 C12.1 C16.1 C17.1 C18.1 C19.2 C20.1 C21.1 C22.1 C23.1 C24.1 C25.1 C26.1 C28.1 C29.1 C30.1 C31.1 C32.1 CPU1.10 CPU1.19 CPU1.20 CPU1.27 CPU1.37 CPU1.49 CPU1.74 CPU1.99 D4.1 D5.1 D6.1 D8.1 D9.1 D11.2 D16.2 E1.2 E1.4 E2.2 E2.4 P1.2 P2.2 P3.2 P4.2 P5.2 P6.2 P7.2 P8.6 P9.14 P9.16 P10.1 P11.4 P13.7 P14.2 Q4.2 Q5.1 Q7.2 Q14.2 Q17.2 R3.2 R13.2 R14.1 R15.2 R16.2 R17.2 R18.2 R19.1 R38.1 R39.1 R41.2 R47.2 R50.2 R64.1 R70.2 R73.1 S1.1 S1.2 S1.3 S1.4 S1.5 U1.3 U1.5 U2.1 U3.5 U4.5 U6.9 U7.1 U7.2 U8.1 U8.4 U8.18 U8.19 U8.23 U8.24 U8.34 U8.35 U8.42 U8.52 U8.53 U8.55 U8.57 U8.66 U8.68 | length 3016.7
  Top Layer w10: U7.2@1052.68,-3130 U7.1@1052.68,-3092.6 ; CPU1.49@2903.46,-1882.76 2903.46,-1928.46 2920,-1945 2955,-1945 v1(2975,-1965) ; v1(3270,-2260) 3340,-2260 3360.94,-2239.06 CPU1.10@3417.24,-2239.06 ; CPU1.19@3417.24,-2061.89 3341.89,-2061.89 3335,-2055 3347.8,-2042.2 CPU1.20@3417.24,-2042.2
  Top Layer w20: U8.68@1335,-3696.3 1335,-3700.24 U8.1@1474.76,-3840 ; U8.66@1335,-3609.69 1539.69,-3609.69 1604.69,-3674.69 U8.4@1604.69,-3840 ; U8.55@1335,-3133.31 1421.69,-3133.31 1474.76,-3080.24 1474.76,-3045 ; U8.53@1335,-3046.69 1473.07,-3046.69 1474.76,-3045 ; U8.52@1474.76,-2902.99 1474.76,-3045 ; U8.42@1907.83,-2902.99 1907.83,-2992.83 1965,-3050 2210,-3050 ; U8.35@2210.98,-2902.99 2210.98,-3049.02 2210,-3050 ; U8.19@2350.75,-3696.3 2176.3,-3696.3 2110,-3630 2110,-3535 2165.24,-3479.76 U8.24@2350.75,-3479.76 U8.23@2350.75,-3523.07 ; U8.34@2350.75,-3046.69 2347.44,-3050 2210,-3050
  other v1: 4165,-4305 4235,-4305 5820,-4305 570,-4295 745,-4295 5590,-4295 5710,-4290 645,-4280 3940,-4280 5315,-4265 5435,-4265 3375,-4255 4480,-4255 800,-4250 3460,-4250 4255,-4250 5540,-4250 5645,-4250 4335,-4245 5760,-4245 5870,-4245 555,-4240 1815,-4240 4415,-4240 1275,-4235 700,-4230 1150,-4230 1410,-4230 1540,-4230 1705,-4230 2750,-4230 2030,-4225 1010,-4215 5380,-4215 1665,-4210 2285,-4210 635,-4200 775,-4180 540,-4175 2150,-4175 4335,-4175 5175,-4175 1710,-4170 2405,-4170 4405,-4165 1180,-4160 5070,-4160 1340,-4155 2755,-4155 2930,-4155 5430,-4155 1075,-4150 1610,-4150 2845,-4150 3000,-4150 3365,-4150 4490,-4150 1455,-4145 4590,-4145 940,-4140 1750,-4130 5225,-4130 1305,-4125 5145,-4125 1935,-4115 3140,-4105 665,-4100 2980,-4100 4610,-4095 5020,-4095 770,-4090 1110,-4090 2610,-4090 4390,-4090 4545,-4090 3335,-4085 4445,-4085 5760,-4085 550,-4080 855,-4075 2135,-4075 4325,-4075 1625,-4070 1750,-4070 1530,-4065 1955,-4065 2910,-4065 3475,-4065 5905,-4065 2770,-4045 2875,-4035 2180,-4030 5210,-4030 3535,-4025 5760,-4025 2225,-4020 3595,-4020 3640,-4020 4390,-4020 4505,-4020 4565,-4020 4620,-4020 5305,-4020 800,-4015 1115,-4015 1380,-4015 1540,-4015 1805,-4015 4850,-4015 5130,-4015 2000,-4010 2365,-4010 3085,-4010 1325,-4005 4960,-4005 660,-3995 880,-3995 1710,-3995 3840,-3995 1630,-3990 2085,-3990 5870,-3990 545,-3985 5445,-3985 2335,-3980 1390,-3975 1460,-3975 3395,-3975 3470,-3975 2860,-3970 3560,-3970 3035,-3965 3700,-3965 3790,-3960 985,-3955 5190,-3955 5295,-3955 5520,-3955 1225,-3950 4890,-3945 5585,-3940 5090,-3935 5660,-3930 2755,-3925 3630,-3920 910,-3915 2990,-3915 3475,-3915 5445,-3915 805,-3910 4815,-3910 575,-3905 685,-3905 5010,-3905 1035,-3895 2265,-3895 5525,-3895 3725,-3890 3410,-3880 3550,-3880 5590,-3880 5695,-3880 2385,-3875 4570,-3875 1160,-3870 2950,-3870 4510,-3870 4080,-3865 5275,-3865 2860,-3860 3305,-3860 5180,-3860 950,-3855 3480,-3855 4275,-3855 4425,-3855 5085,-3855 5830,-3855 1220,-3840 3670,-3840 4335,-3835 4965,-3835 780,-3830 1005,-3830 1090,-3830 2750,-3830 625,-3825 700,-3825 1285,-3825 3995,-3825 4775,-3825 5520,-3825 5245,-3820 4535,-3815 3230,-3810 3415,-3810 5705,-3810 890,-3805 4110,-3805 545,-3800 4220,-3800 4470,-3795 2310,-3785 4410,-3780 2420,-3775 3600,-3775 1010,-3770 1085,-3770 1215,-3760 1270,-3760 2845,-3760 3470,-3740 4670,-3740 5825,-3740 1540,-3735 2090,-3735 2750,-3735 3195,-3735 3935,-3735 4860,-3735 580,-3730 1995,-3730 4110,-3730 5155,-3725 5220,-3725 3290,-3720 4415,-3720 5305,-3720 1850,-3715 3105,-3715 4015,-3715 4265,-3715 5045,-3715 1005,-3710 1055,-3710 1100,-3710 1215,-3710 3410,-3695 4345,-3695 1725,-3690 1475,-3680 3540,-3680 4210,-3675 2845,-3665 3200,-3665 4390,-3665 4610,-3665 545,-3660 1880,-3660 2765,-3660 3105,-3650 4955,-3650 3270,-3645 3825,-3645 4770,-3645 5040,-3640 5190,-3640 5250,-3640 5340,-3640 4085,-3635 5115,-3635 1675,-3625 2015,-3620 3905,-3620 4005,-3620 4350,-3620 5815,-3620 5400,-3605 1010,-3600 1065,-3600 1125,-3600 1180,-3600 1235,-3600 1800,-3600 2225,-3600 530,-3595 4540,-3595 3195,-3590 585,-3585 3470,-3585 4235,-3585 1915,-3580 3110,-3575 5000,-3570 3285,-3565 5430,-3560 1685,-3555 1120,-3545 3415,-3545 3810,-3545 3880,-3545 4665,-3545 2025,-3540 3965,-3540 2200,-3535 2615,-3535 3720,-3535 4055,-3535 5820,-3535 955,-3530 1465,-3530 4465,-3530 4850,-3530 5130,-3530 525,-3525 585,-3525 5360,-3525 1570,-3520 3095,-3510 3175,-3510 3270,-3510 4215,-3510 1190,-3500 4930,-3495 1800,-3490 1915,-3490 1030,-3485 670,-3480 755,-3480 825,-3480 3470,-3480 1110,-3475 5525,-3475 940,-3465 5065,-3465 4410,-3460 4795,-3460 4580,-3455 545,-3440 3180,-3435 3275,-3435 5260,-3435 600,-3430 710,-3430 4870,-3430 5395,-3430 655,-3425 785,-3425 1175,-3425 3100,-3425 995,-3420 1540,-3420 1665,-3420 1080,-3415 3410,-3415 5830,-3415 2000,-3410 2455,-3410 2850,-3405 5010,-3405 4350,-3400 880,-3395 4510,-3390 4735,-3390 1470,-3385 2185,-3385 2780,-3385 5160,-3375 1220,-3370 4810,-3360 5525,-3360 3195,-3355 3115,-3350 3280,-3350 2430,-3345 495,-3335 920,-3335 975,-3335 4660,-3335 870,-3330 1035,-3330 1085,-3330 2085,-3330 4445,-3330 4925,-3330 820,-3325 5380,-3320 1480,-3310 1580,-3310 2850,-3310 5815,-3290 5275,-3285 1700,-3280 5040,-3280 5655,-3280 1990,-3275 2235,-3270 4375,-3265 4565,-3265 4635,-3265 4725,-3265 4845,-3265 2480,-3260 3885,-3260 3960,-3260 1825,-3245 2145,-3245 5510,-3245 5610,-3240 495,-3230 2770,-3225 2845,-3225 4115,-3220 825,-3210 870,-3210 915,-3210 960,-3210 1000,-3210 1525,-3205 5345,-3205 5820,-3205 1575,-3200 4355,-3200 500,-3185 4485,-3185 2000,-3175 1650,-3170 4145,-3165 1845,-3160 1915,-3160 4075,-3160 1740,-3155 5525,-3155 2070,-3150 2255,-3150 4435,-3150 2145,-3145 820,-3140 905,-3135 3675,-3125 2790,-3120 495,-3115 1555,-3095 960,-3090 5360,-3090 4420,-3085 5830,-3085 790,-3080 655,-3075 3280,-3070 2835,-3065 3685,-3065 2775,-3060 5085,-3055 510,-3050 5415,-3050 3615,-3045 900,-3035 5310,-3035 600,-3030 1115,-3030 5820,-3020 1545,-3015 3565,-3010 1995,-3000 2105,-3000 2445,-3000 3680,-3000 5350,-2995 810,-2990 1050,-2990 1290,-2990 3610,-2990 3975,-2990 4075,-2990 4170,-2990 4430,-2990 2315,-2985 520,-2980 5510,-2980 3875,-2975 3780,-2970 610,-2965 940,-2965 1160,-2965 2780,-2965 2845,-2965 5100,-2965 1390,-2950 3675,-2950 2285,-2940 2375,-2940 1290,-2930 4475,-2930 5460,-2925 2430,-2920 1100,-2915 5820,-2915 505,-2910 4540,-2900 5095,-2900 1005,-2895 5550,-2890 910,-2885 2820,-2880 2340,-2875 3675,-2875 5310,-2875 5390,-2870 2460,-2865 1385,-2860 3405,-2860 4605,-2860 1150,-2855 3985,-2855 2775,-2850 4065,-2850 4140,-2850 525,-2845 3890,-2845 600,-2840 950,-2840 1055,-2840 2635,-2840 3800,-2840 5510,-2840 5350,-2835 1430,-2830 3095,-2825 4660,-2820 815,-2815 4905,-2815 5300,-2815 5465,-2810 3680,-2800 5215,-2795 1000,-2785 495,-2780 600,-2775 5820,-2770 5550,-2760 820,-2750 895,-2730 5510,-2720 5400,-2715 5460,-2715 2280,-2705 5825,-2700 520,-2690 895,-2675 5115,-2670 5585,-2665 1215,-2655 5690,-2655 605,-2640 4715,-2640 500,-2605 5630,-2605 5825,-2600 815,-2595 5445,-2580 605,-2565 2610,-2565 5505,-2565 890,-2560 815,-2545 4805,-2530 5085,-2530 890,-2515 5015,-2510 5520,-2510 4945,-2495 3820,-2485 3420,-2475 5550,-2465 890,-2460 5830,-2460 605,-2450 4010,-2445 4555,-2445 4635,-2430 5460,-2430 4085,-2420 5105,-2420 5540,-2400 3040,-2395 3100,-2390 3235,-2390 4555,-2390 590,-2385 3925,-2385 3145,-2380 3835,-2380 505,-2370 2900,-2360 4080,-2360 5825,-2360 5505,-2355 890,-2350 4720,-2350 5075,-2345 2945,-2340 3205,-2340 3110,-2335 4015,-2325 4165,-2315 520,-2300 2995,-2300 3655,-2300 2910,-2295 890,-2285 3150,-2285 3320,-2285 4555,-2285 755,-2275 4805,-2275 650,-2270 5830,-2270 2945,-2250 5555,-2245 3050,-2240 605,-2225 790,-2220 4555,-2220 4755,-2220 2905,-2215 3935,-2205 4950,-2205 890,-2195 2995,-2195 4295,-2195 5535,-2190 3055,-2185 3200,-2185 3255,-2180 3315,-2180 5010,-2180 1045,-2175 4120,-2175 620,-2160 2905,-2160 2955,-2160 785,-2155 2270,-2145 3015,-2145 515,-2140 1100,-2135 3265,-2130 3335,-2130 2075,-2125 675,-2110 745,-2110 3120,-2110 2910,-2105 2965,-2105 3305,-2100 1045,-2095 5060,-2095 5265,-2095 5530,-2090 4285,-2085 115,-2070 515,-2070 3175,-2070 5830,-2070 795,-2065 890,-2065 3070,-2050 2915,-2045 4685,-2045 5090,-2045 615,-2040 3135,-2040 4140,-2040 3495,-2030 4640,-2020 5435,-2020 5635,-2020 515,-2015 3195,-2015 50,-2005 3085,-2005 3910,-2000 3010,-1995 800,-1990 3250,-1990 4280,-1990 5060,-1990 5515,-1985 4850,-1980 5585,-1975 610,-1970 3190,-1970 4095,-1970 2040,-1965 3055,-1965 3120,-1965 890,-1955 2220,-1955 175,-1945 520,-1945 275,-1940 450,-1940 4960,-1935 5020,-1930 5515,-1930 805,-1925 5825,-1910 4110,-1895 500,-1885 3650,-1885 4615,-1880 5405,-1880 3495,-1875 810,-1870 50,-1865 3840,-1855 4855,-1850 5490,-1835 4690,-1830 5075,-1815 3155,-1810 3645,-1805 3780,-1805 5825,-1805 3040,-1800 3375,-1800 1080,-1785 1385,-1780 5365,-1775 5050,-1770 45,-1755 390,-1755 1270,-1750 3665,-1745 1140,-1730 2470,-1725 3065,-1725 435,-1720 1220,-1720 3140,-1720 2400,-1710 2880,-1710 1350,-1705 3735,-1705 5820,-1705 3840,-1700 5260,-1700 360,-1690 1075,-1685 3540,-1685 495,-1675 5120,-1675 430,-1670 4940,-1670 5380,-1665 50,-1655 2440,-1650 3790,-1650 4815,-1650 4345,-1640 4465,-1640 3975,-1635 305,-1630 380,-1630 3875,-1630 535,-1625 5235,-1625 2860,-1620 5065,-1620 465,-1615 3535,-1615 5820,-1610 2155,-1595 4545,-1595 4485,-1590 2030,-1580 525,-1575 1085,-1575 300,-1570 385,-1560 580,-1560 1355,-1550 465,-1545 1285,-1545 3535,-1545 4825,-1545 3655,-1540 5055,-1540 1130,-1535 55,-1525 5400,-1525 2850,-1520 225,-1515 720,-1510 2200,-1505 550,-1500 775,-1500 2115,-1500 170,-1495 5515,-1495 5055,-1490 2010,-1485 4390,-1485 4495,-1485 5835,-1485 620,-1470 1305,-1470 1100,-1465 1170,-1465 1375,-1465 4835,-1465 5345,-1465 3790,-1460 4035,-1460 110,-1445 465,-1445 690,-1440 5280,-1440 2205,-1435 4780,-1430 5055,-1430 3680,-1425 245,-1420 3430,-1420 2975,-1415 3355,-1410 4505,-1410 370,-1405 2035,-1405 2845,-1405 3285,-1405 5405,-1405 3980,-1400 3065,-1395 3215,-1395 4385,-1395 3535,-1390 65,-1380 2215,-1370 5525,-1370 2100,-1365 5825,-1365 525,-1360 1325,-1360 5605,-1360 1125,-1355 3140,-1355 655,-1350 705,-1350 765,-1350 1225,-1350 270,-1330 200,-1325 1735,-1310 2860,-1305 360,-1290 3575,-1285 4490,-1280 3060,-1275 5165,-1275 170,-1270 4335,-1270 320,-1265 3285,-1265 3360,-1265 3430,-1265 3140,-1260 3215,-1260 2975,-1255 3835,-1255 5825,-1255 1685,-1245 4755,-1235 4840,-1235 365,-1215 3980,-1215 5470,-1215 165,-1210 300,-1210 4305,-1210 5125,-1205 5820,-1205 2580,-1195 4385,-1190 565,-1185 715,-1185 4790,-1185 250,-1180 1500,-1175 5190,-1175 70,-1165 1335,-1165 3755,-1160 485,-1155 2865,-1155 3605,-1155 3890,-1155 645,-1150 775,-1150 195,-1140 4485,-1135 5535,-1135 320,-1130 1205,-1125 380,-1120 1580,-1120 2035,-1115 1855,-1110 2585,-1110 4760,-1105 4365,-1100 5200,-1100 100,-1095 260,-1090 1450,-1090 4815,-1090 1085,-1080 4485,-1075 2535,-1070 2805,-1070 5535,-1070 1745,-1065 345,-1055 1625,-1050 1955,-1050 1245,-1045 3150,-1040 5830,-1040 4715,-1035 4805,-1015 5490,-1015 2065,-1010 4390,-1010 165,-1005 85,-1000 5430,-1000 3170,-985 385,-980 290,-975 1525,-975 5530,-975 215,-970 2170,-970 1110,-965 675,-960 1770,-960 845,-940 1320,-935 5830,-930 155,-925 575,-920 4840,-910 75,-905 2455,-905 2080,-900 2320,-900 2565,-900 1180,-895 1595,-895 1890,-890 4260,-890 1435,-880 2930,-880 3895,-880 640,-875 3780,-875 720,-870 5700,-870 5830,-870 840,-865 280,-860 375,-860 3585,-860 5620,-860 4510,-850 5350,-850 5410,-850 3440,-845 195,-840 2145,-840 3035,-840 2870,-835 3175,-835 4020,-835 2395,-830 3940,-830 4185,-830 75,-825 3370,-825 3855,-825 4795,-815 5535,-805 5830,-805 1395,-800 1515,-800 4955,-800 5350,-800 1635,-795 2040,-795 3765,-795 1210,-790 1300,-790 3650,-790 4385,-790 670,-785 1100,-785 1905,-785 2590,-785 240,-780 4110,-780 375,-775 3295,-770 3530,-770 4510,-770 305,-765 2985,-765 4635,-765 4745,-765 565,-760 790,-760 2350,-760 2460,-760 2805,-760 3965,-760 2160,-750 3725,-750 3850,-750 180,-735 4330,-735 4940,-730 5440,-730 80,-705 4755,-690 5600,-690 360,-685 4975,-675 5060,-675 5340,-675 5130,-670 5200,-670 180,-660 5525,-655 315,-640 255,-620 5485,-615 550,-610 375,-600 4205,-600 5540,-595 75,-585 4385,-580 800,-565 4570,-565 4810,-565 4900,-565 185,-560 850,-550 285,-540 650,-535 4640,-530 1410,-525 1280,-520 1540,-515 380,-505 1150,-505 4850,-505 75,-500 4575,-500 1015,-495 4250,-495 4955,-495 4365,-490 5230,-490 880,-485 4025,-485 5720,-485 3890,-475 4680,-455 1850,-450 4595,-450 4725,-450 205,-440 795,-440 1980,-440 5545,-440 115,-435 4995,-435 5240,-435 270,-425 635,-420 3950,-420 945,-415 1295,-415 1385,-415 1465,-415 1170,-410 1045,-405 2750,-400 4105,-400 2465,-390 2575,-390 2345,-380 2820,-380 4740,-380 5245,-380 5075,-375 5545,-375 405,-370 2085,-370 1890,-365 5185,-365 2690,-355 2265,-335 2495,-335 2390,-330 5710,-330 2135,-320 610,-315 1845,-315 405,-305 1755,-300 2575,-290 2665,-285 2010,-270 2770,-265 405,-250 5225,-245 2470,-240 1425,-235 5545,-235 1050,-230 1210,-230 1635,-230 4150,-230 5465,-225 2395,-220 2555,-220 4630,-220 4830,-220 2650,-215 670,-210 2715,-205 5235,-195 5710,-195 1785,-190 1165,-180 1930,-180 2105,-180 2460,-180 1370,-175 1535,-175 5545,-175 430,-170 2800,-170 5480,-170 1040,-160 2260,-160 4650,-160 4820,-160 2760,-130 5295,-130 490,-125 4740,-120 5645,-120 425,-110 5355,-95 4815,-90 4355,-85 4665,-85 5425,-85 5525,-85 5170,-80 5265,-80 5105,-75 1500,-65 505,-60 1710,-60 1905,-60 2065,-60 2275,-60 440,-55
GPIO0: P9.10
GPIO2: P9.12
GPIO4: P9.6
GPIO5: P9.8
GPIO12: P9.11
GPIO13: P9.13
GPIO14: P9.9
GPIO16: P9.7
INVCC: F1.2 P1.1
NetC8_1: C8.1 R7.1 R14.2 | length 253.3
  Top Layer w20: R14.2@5344.28,-1942.61 C8.1@5344.28,-1829 ; R7.1@5351.96,-2090 R14.2@5351.96,-1950.28
NetC9_2: C9.2 R8.1 R15.1 | length 199.9
  Top Layer w20: R8.1@5344.77,-2514.77 C9.2@5344.77,-2421.34 5345,-2421.11 R15.1@5345,-2315
NetC10_2: C10.2 R9.1 R16.1 | length 220
  Top Layer w20: R9.1@5360,-1150 R16.1@5360,-930
NetC11_2: C11.2 R10.1 R17.1 | length 254.9
  Top Layer w10: R10.1@5575,-4160 5706.11,-4160 C11.2@5706.34,-4160.23 R17.1@5829.77,-4160.23
NetC12_2: C12.2 R11.1 R18.1 | length 229.9
  Top Layer w20: R11.1@5360,-415 5360,-297.86 R18.1@5360.23,-297.63 C12.2@5360.23,-185.23
NetC27_1: C27.1 E1.1 pad.1@605,-3265 | length 103.5
  Top Layer w40: E1.1@718,-3265 C27.1@821.54,-3265
NetC27_2: C27.2 L2.1 | length 109
  Top Layer w30: C27.2@888.46,-3265 L2.1@997.44,-3265
NetC30_2: C30.2 E2.1 pad.1@710,-3650 R52.2 | length 277.1
  Top Layer w30: C30.2@948.66,-3739.77 948.66,-3655
  Top Layer w40: E2.1@823,-3650 824.34,-3651.34 R52.2@1014.77,-3651.34
NetCard1_2: Card1.2 D16.4 R45.1 | length 1768.5
  Top Layer w10: R45.1@2680,-2921 2969,-2921 v2(2970,-2920) 3002.4,-2887.6 D16.4@3057.68,-2887.6 ; Card1.2@3180,-4210 v2(3180,-4025)
  Bottom Layer w10: v2(2970,-2920) 2970,-3815 v2(3180,-4025)
NetCard1_3: Card1.3 D16.5 R44.1 | length 1711.6
  Top Layer w10: R44.1@2675,-3006 2889,-3006 v2(2910,-2985) 2970,-2985 3030,-2925 D16.5@3057.68,-2925 ; Card1.3@3080,-4210 v2(3080,-4083.66)
  Bottom Layer w10: v2(2910,-2985) 2910,-3913.66 v2(3080,-4083.66)
NetCard1_5: Card1.5 D16.1 | length 325.9
  Top Layer w10: D16.1@3142.32,-2962.4 3142.32,-3188.07 Card1.5@3180,-3225.75
  Top Layer w20: Card1.5@3180,-3272.68 Card1.5@3180,-3225.75